# Altium PCB graduation_project.PcbDoc
Units mm, origin at the board's own origin, x right, y up, seen from the top; angles counter-clockwise.
Board outline 49.02 x 58.29 mm, 2 copper layers (Top Layer, Bottom Layer); 28 components, 24 nets, 114 pads, 0 vias.
Unrouted connection lines stored in the file: 63.
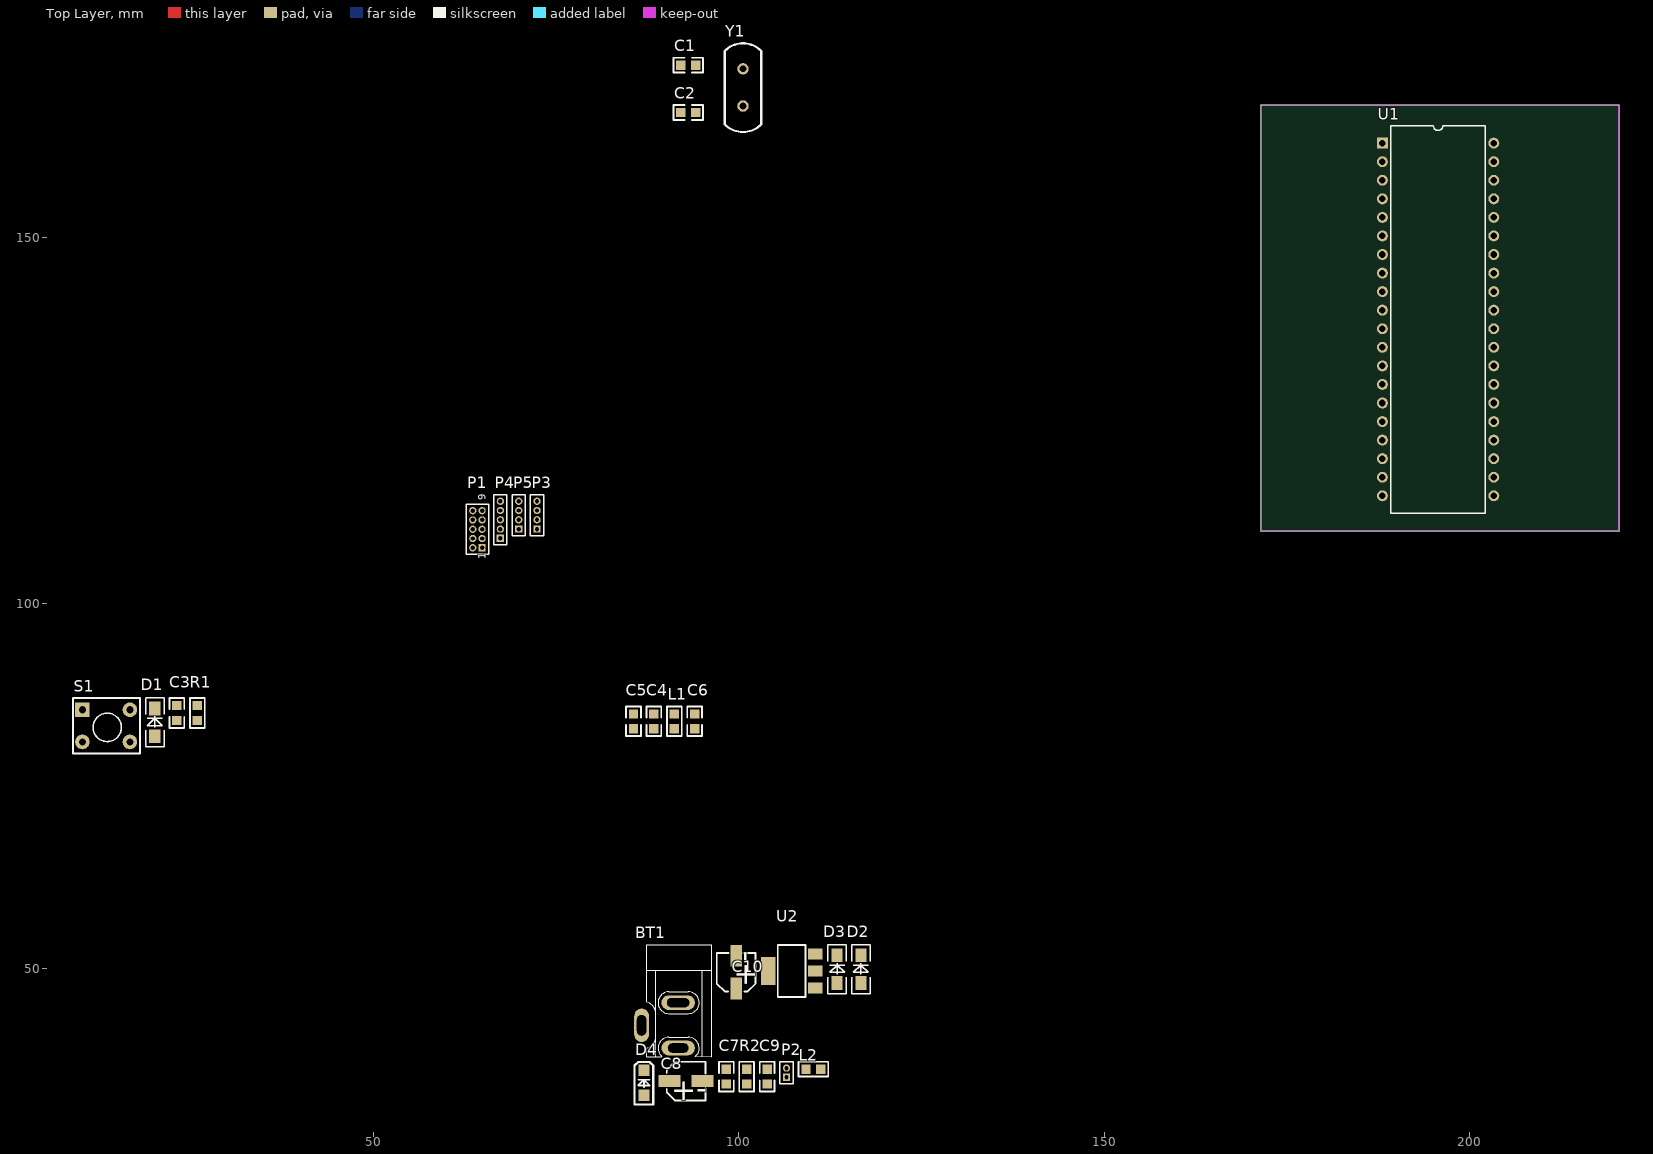
[diagram p0: Top Layer view]
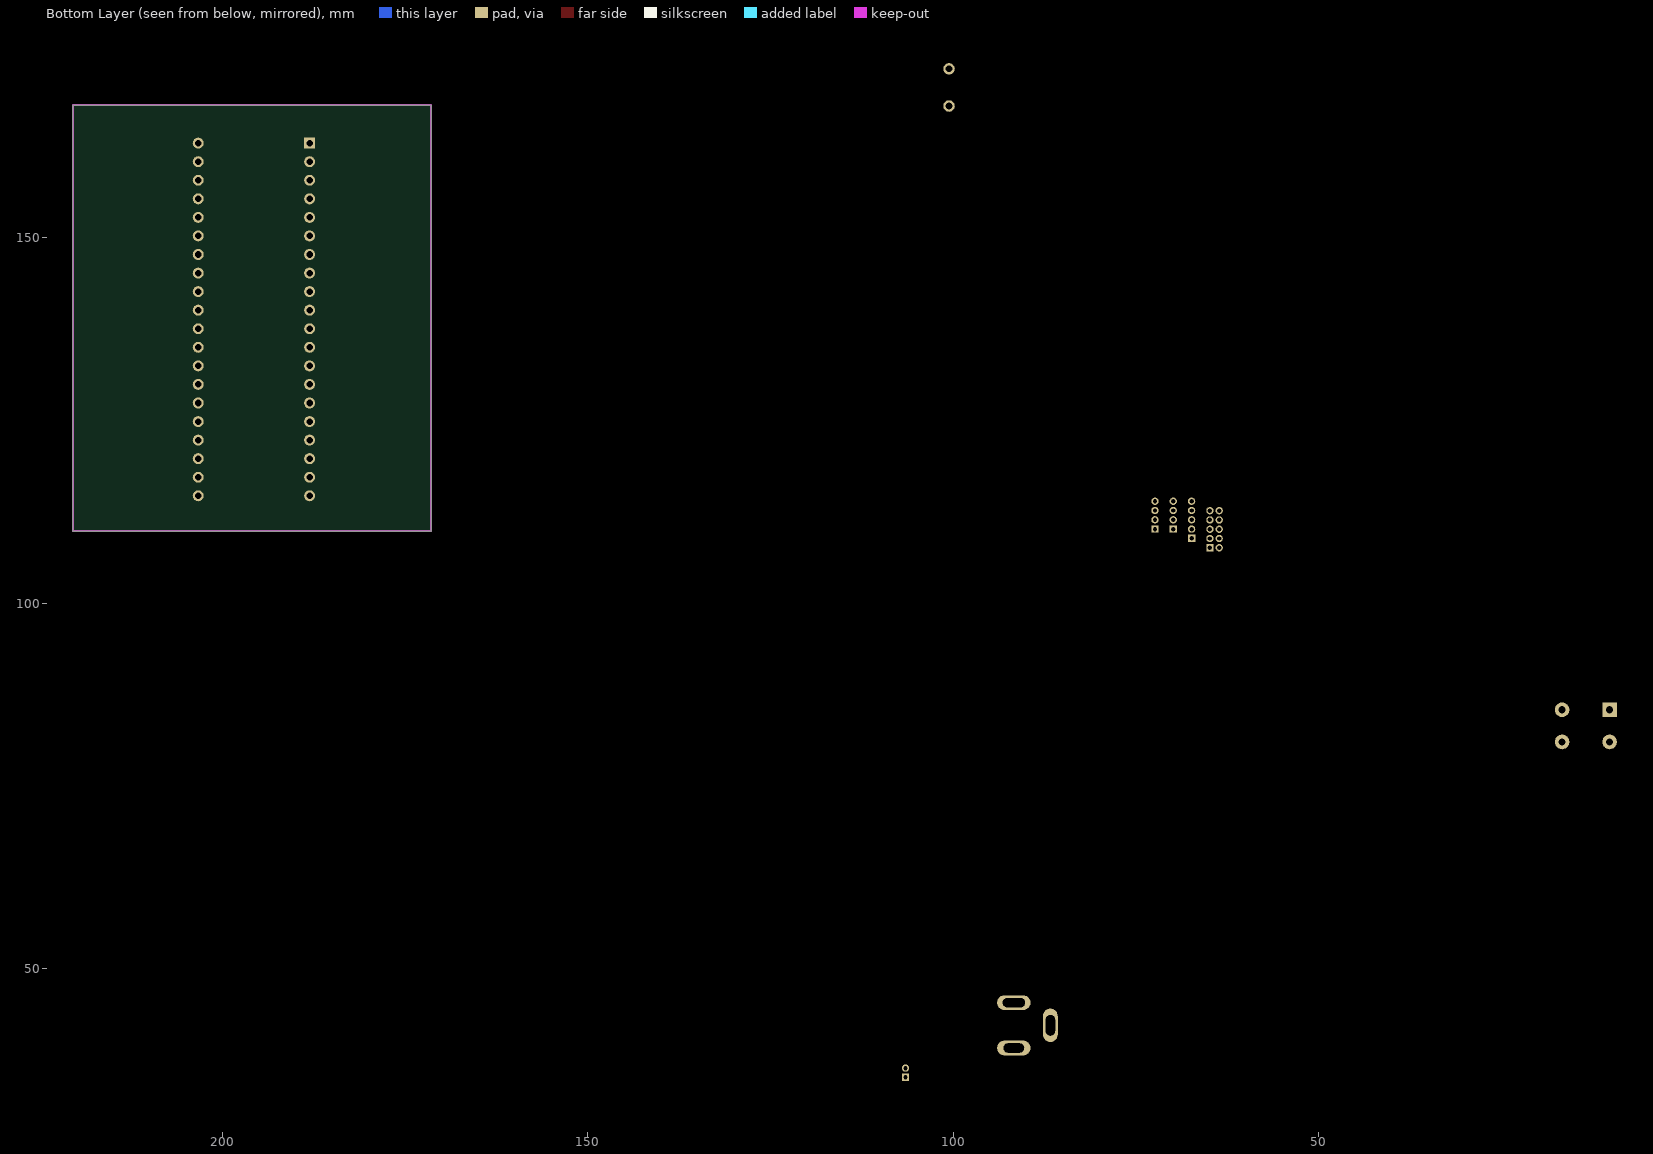
[diagram p1: Bottom Layer view, seen from below]

## Layer stack, top to bottom
Top Solder: solder mask 0.0102, Solder Resist, Dk 3.5
Top Layer: signal copper 0.0356
Dielectric 1: dielectric 0.32, FR-4, Dk 4.8
Bottom Layer: signal copper 0.0356
Bottom Solder: solder mask 0.0102, Solder Resist, Dk 3.5

## Board outline
171.45,109.855 220.472,109.855 220.472,168.148 171.45,168.148

## Design rules (kind name [scope] priority, off if disabled: settings)
Clearance [All] p1: gap=0.254 ignorepadtopadclearanceinfootprint=FALSE except(0: Arc-Hole Track-Hole SMDPad-Hole THPad-Hole Via-Hole Fill-Hole Poly-Hole Region-Hole Text-Hole)
PolygonConnect [All] p1: connectstyle=Relief reliefconductorwidth=0.254 reliefentries=4 polygonreliefangle="90 Angle" airgapwidth=0.254
RoutingVias [All] p1: holewidth=0.711 width=1.27 viastyle="Through Hole" minholewidth=0.711 minwidth=1.27 maxholewidth=0.711 maxwidth=1.27
SolderMaskExpansion [All] p1: expansion=0.102
Width [All] p1: maxlimit=0.254 minlimit=0.254 preferedwidth=0.254
30 further rules are at their usual default settings.

## Components (designator, comment, footprint, x,y, rotation, side; value= is the part's Value field where it differs from the comment)
BT1 "Battery" DC10B 87.398,49.764 r270 top
C1 "Cap" C0805 92.075,173.609 r0 top value=104
C2 "Cap" C0805 92.075,167.132 r0 top value=104
C3 "Cap" C0805 23.116,83.947 r90 top value=104
C4 "Cap" C0805 88.392,82.804 r90 top value=104
C5 "Cap" C0805 85.598,82.804 r90 top value=104
C6 "Cap" C0805 93.98,82.804 r90 top value=104
C7 "Cap" C0805 98.305,34.194 r90 top value=104
C8 "Cap Pol3" CAP5*5_4 90.552,34.592 r0 top value=10uF/16V
C9 "Cap" C0805 103.893,34.194 r90 top value=104
C10 "Cap Pol3" CAP5*5_4 99.649,47.238 r90 top value=10uF/16V
D1 "1N4148" 1N4148-T 20.095,81.777 r90 top
D2 "1N4001" 1N4148-T 116.71,47.995 r90 top
D3 "1N4001" 1N4148-T 113.462,47.995 r90 top
D4 "LED0" LED1206 87.02,32.644 r90 top
L1 "Inductor" R0805 91.186,82.804 r90 top value=10uH
L2 "Inductor" R0805 109.195,36.226 r0 top value=100mH
P1 "ISP" MHDR2X5 64.881,107.569 r90 top
P2 "MHDR1X2" MHDR1X2 106.544,35.099 r90 top
P3 "L298N" MHDR1X4 72.405,110.125 r90 top
P4 "Bluetooth" MHDR1X5 67.389,108.855 r90 top
P5 "HC-SR04" MHDR1X4 69.897,110.125 r90 top
R1 "Res2" R0805 25.91,83.947 r90 top value=10K
R2 "Res2" R0805 101.099,34.194 r90 top value=1K
S1 "SW-PB" SWITCH 10.19,85.395 r0 top
U1 "ATmega16-16PI" 40P6 195.707,138.811 r270 top
U2 "LM1117-5" SOT223 110.479,47.357 r90 top
Y1 "8MHz" XTAL 100.584,170.561 r90 top

## Footprints (in the part's own frame and the unit in brackets; to place one, negate y for a bottom-side part, rotate by r counter-clockwise, add the part's x,y. Pads: shape width x height; smd on the part's side, far side on the other; paste and mask are expansions set on the pad)
1N4148-T [mil]
  rect 75x60 smd: 1(0,0) 2(150,0)
  silkscreen extent -56,-50 206,50
40P6 [mm] "DIP; 40 Leads; Row Spacing 15.24 mm; Pitch 2.54 mm"
  rect 1.5x1.5 hole 0.9: 1(-24.13,-7.62)
  round 1.5 hole 0.9: 2(-21.59,-7.62) 3(-19.05,-7.62) 4(-16.51,-7.62) 5(-13.97,-7.62) 6(-11.43,-7.62) 7(-8.89,-7.62) 8(-6.35,-7.62) 9(-3.81,-7.62) 10(-1.27,-7.62) 11(1.27,-7.62) 12(3.81,-7.62) 13(6.35,-7.62) 14(8.89,-7.62) 15(11.43,-7.62) 16(13.97,-7.62) 17(16.51,-7.62) 18(19.05,-7.62) 19(21.59,-7.62) 20(24.13,-7.62) 21(24.13,7.62) 22(21.59,7.62) 23(19.05,7.62) 24(16.51,7.62) 25(13.97,7.62) 26(11.43,7.62) 27(8.89,7.62) 28(6.35,7.62) 29(3.81,7.62) 30(1.27,7.62) 31(-1.27,7.62) 32(-3.81,7.62) 33(-6.35,7.62) 34(-8.89,7.62) 35(-11.43,7.62) 36(-13.97,7.62) 37(-16.51,7.62) 38(-19.05,7.62) 39(-21.59,7.62) 40(-24.13,7.62)
  silkscreen extent -26.5,-6.45 26.5,6.45
C0805 [mil]
  rect 50x50 smd: 1(0,0) 2(80,0)
  silkscreen extent -40,-40 120,40, body extent 1,-24 79,25, height 31
CAP5*5_4 [mm]
  rect 3x1.6 smd: 1(0,0) 2(4.5,0)
  silkscreen extent -0.4,-2.65 4.9,2.65, body extent -0.77,-2.67 5.13,2.63, height 5.41
DC10B [mil]
  oval 80x180 hole 50 slot 110 at 90 deg: 1(419.09,170)
  oval 80x180 hole 50 slot 120 at 90 deg: 2(175,170)
  oval 180x80 hole 50 slot 110 at 0 deg: 3(297.05,-26.85)
  silkscreen extent -138,0 465,350
LED1206 [mil]
  rect 60x60 smd: 1(0,0) 2(135,0)
  silkscreen extent -50,-50 180,50
MHDR1X2 [mm] "Connector; Header; 2 Position"
  rect 1x1 hole 0.6: 1(0,0)
  round 1 hole 0.6: 2(1.27,0)
  silkscreen extent -0.9,-0.9 2.17,0.9
MHDR1X4 [mm] "Connector; Header; 4 Position"
  rect 1x1 hole 0.6: 1(0,0)
  round 1 hole 0.6: 2(1.27,0) 3(2.54,0) 4(3.81,0)
  silkscreen extent -0.9,-0.9 4.71,0.9
MHDR1X5 [mm] "Connector; Header; 5 Position"
  rect 1x1 hole 0.6: 1(0,0)
  round 1 hole 0.6: 2(1.27,0) 3(2.54,0) 4(3.81,0) 5(5.08,0)
  silkscreen extent -0.9,-0.9 5.98,0.9
MHDR2X5 [mm] "Connector; Header; 5x2 Position"
  rect 1x1 hole 0.6: 1(0,0)
  round 1 hole 0.6: 2(0,1.27) 3(1.27,0) 4(1.27,1.27) 5(2.54,0) 6(2.54,1.27) 7(3.81,0) 8(3.81,1.27) 9(5.08,0) 10(5.08,1.27)
  silkscreen extent -0.9,-0.9 5.98,2.17
R0805 [mil]
  rect 50x50 smd: 1(0,0) 2(80,0)
  silkscreen extent -40,-40 120,40
SOT223 [mil]
  rect 59x79 smd: 1(0,0) 2(90.55,0) 3(181.1,0)
  rect 150x79 smd: 4(89.88,253.54)
  silkscreen extent -49,52 231,202
SWITCH [mm]
  rect 2x2 hole 1: 1(0,0)
  round 2 hole 1: 2(0,-4.4) 3(6.5,-4.4) 4(6.5,0)
  silkscreen extent -1.3,-6 7.9,1.6
XTAL [mil]
  round 62 hole 35.43: 1(-100,0) 2(100,0)
  silkscreen extent -240,-100 238,100

## Part data
BT1: "Multicell Battery", LatestRevisionDate=17-Jul-2002, LatestRevisionNote="Re-released for DXP Platform.", PackageReference=BAT-2, Published=24-Mar-1999, Publisher="Altium Limited"
C1 C2 C3 C4 C5 C6 C7 C9: "Capacitor", LatestRevisionDate=17-Jul-2002, LatestRevisionNote="Re-released for DXP Platform.", PackageReference=RAD-0.3, Published=8-Jun-2000, Publisher="Altium Limited"
C8 C10: "Polarized Capacitor (Surface Mount)", LatestRevisionDate=29-May-2009, LatestRevisionNote="IPC-7351 Footprint Added.", PackageDescription="Chip Capacitor", PackageReference=C0805, Published=8-Jun-2000, Publisher="Altium Limited"
D1 D2 D3: library part Diode, "Default Diode", Code_JEDEC=DO-214-AB, LatestRevisionDate=17-Jul-2002, LatestRevisionNote="Re-released for DXP Platform.", PackageReference=SMC, PackageVersion=Sep-1996, Published=8-Jun-2000, Publisher="Altium Limited"
D4: "Typical INFRARED GaAs LED", LatestRevisionDate=08-Jul-2005, LatestRevisionNote="Mech Layer 1 removed.", PackageReference=LED-0, Published=8-Jun-2000, Publisher="Altium Limited"
P1: library part MHDR2X5, "Header, 5-Pin, Dual row", LatestRevisionDate=17-Jul-2002, LatestRevisionNote="Re-released for DXP Platform.", Publisher="Altium Limited"
P2: "Header, 2-Pin", LatestRevisionDate=17-Jul-2002, LatestRevisionNote="Re-released for DXP Platform.", Publisher="Altium Limited"
P3 P5: library part MHDR1X4, "Header, 4-Pin", LatestRevisionDate=17-Jul-2002, LatestRevisionNote="Re-released for DXP Platform.", Publisher="Altium Limited"
P4: library part MHDR1X5, "Header, 5-Pin", LatestRevisionDate=17-Jul-2002, LatestRevisionNote="Re-released for DXP Platform.", Publisher="Altium Limited"
R1 R2: "Resistor", LatestRevisionDate=17-Jul-2002, LatestRevisionNote="Re-released for DXP Platform.", PackageReference=AXIAL-0.4, Published=8-Jun-2000, Publisher="Altium Limited"
S1: "Switch", LatestRevisionDate=17-Jul-2002, LatestRevisionNote="Re-released for DXP Platform.", PackageReference=SPST-2, Published=24-Mar-1999, Publisher="Altium Limited"
U1: "8-Bit AVR Microcontroller with 16K Bytes of In-System Programmable Flash Memory", ComponentLink1Description="Manufacturer Link", ComponentLink1URL=http://www.atmel.com, ComponentLink2Description=Datasheet, ComponentLink2URL=http://www.atmel.com/dyn/resources/prod_documents/doc2466.pdf, DatasheetVersion=2466E-AVR-10/02, LatestRevisionDate=04-Mar-2005, LatestRevisionNote="Stylized 3D Model Added.", PackageDescription="DIP; 40 Leads; Row Spacing 15.24 mm; Pitch 2.54 mm", PackageReference=40P6, PackageVersion=Dec-1999, Published=17-Sep-2003, Publisher="Altium Limited"
U2: library part "Volt Reg", "Voltage Regulator", LatestRevisionDate=29-May-2009, LatestRevisionNote="IPC-7351 Footprint Added.", PackageDescription="3-Pin Transistor Outline Package 2.54 mm Pitch, 15.1 mm Lead Span", PackageReference=D2PAK, Published=24-Mar-1999, Publisher="Altium Limited"
Y1: library part XTAL, "Crystal Oscillator", LatestRevisionDate=17-Jul-2002, LatestRevisionNote="Re-released for DXP Platform.", PackageReference=R38, Published=8-Jun-2000, Publisher="Altium Limited"
L1 L2: Code_IEC=1005, Code_JEITA=0402, LatestRevisionDate=29-May-2009, LatestRevisionNote="IPC-7351 Footprint Added.", PackageDescription="Chip Inductor", PackageReference=0402-A, Published=8-Jun-2000, Publisher="Altium Limited"

## Nets (pads, with @x,y where several pads share a name; then routed paths per layer and width w, separated by ;. In a path a pad name is that pad's centre, name@x,y a point inside that pad or via, vN(x,y) a via of type N, cw(c..) or ccw(c..) an arc to the next point about the centre after c; other vN are vias at no path point)
+5V: C6.2 D1.2 L1.2 P1.2 P2.1 P4.2 P5.1 R1.1 U1.10 U2.3
AGND: U1.31
AREF: C4.2 U1.32
AVCC: C5.2 L1.1 U1.30
ECHO: P5.3 U1.39
GND: BT1.2 C1.1 C2.1 C3.2 C4.1 C5.1 C6.1 C7.1 C8.2 C9.1 C10.2 D4.2 P1.4 P1.6 P1.8 P1.10 P2.2 P4.1 P5.4 S1.2 U1.11 U2.2
IN1: P3.1 U1.1
IN2: P3.2 U1.2
IN3: P3.3 U1.3
IN4: P3.4 U1.4
MISO: P1.9 U1.7
MOSI: P1.1 U1.6
NetBT1_1: BT1.1 D2.1 R2.1
NetC7_2: C7.2 C8.1 D3.2 L2.1
NetC9_2: C9.2 C10.1 L2.2 U2.1
NetD2_2: D2.2 D3.1
NetD4_1: D4.1 R2.2
RESET: C3.1 D1.1 P1.5 R1.2 S1.1 U1.9
RXD: P4.5 U1.14
SCK: P1.7 U1.8
TRIG: P5.2 U1.40
TXD: P4.4 U1.15
XT1: C2.2 U1.13 Y1.1
XT2: C1.2 U1.12 Y1.2
pads on no net: BT1.3 P1.3 P4.3 S1.3 S1.4 U1.5 U1.16 U1.17 U1.18 U1.19 U1.20 U1.21 U1.22 U1.23 U1.24 U1.25 U1.26 U1.27 U1.28 U1.29 U1.33 U1.34 U1.35 U1.36 U1.37 U1.38 U2.4

## Keep-outs
Keep-Out Layer:
  the board outline again, w0.254

## Text inside footprints (layer, text, board x,y; h text height)
C8: Top Overlay "+" at 90.772,31.972 h3; Top Overlay "-" at 94.212,32.152 h3
C10: Top Overlay "+" at 102.269,47.458 h3 r90; Top Overlay "-" at 102.089,50.898 h3 r90
P1: Top Overlay "1" at 65.389,105.969 h1 r90; Top Overlay "9" at 65.389,114.069 h1 r90